# EAGLE board eaa651fdd346d6544176813de3c28a36 (EAGLE 7.1.0)
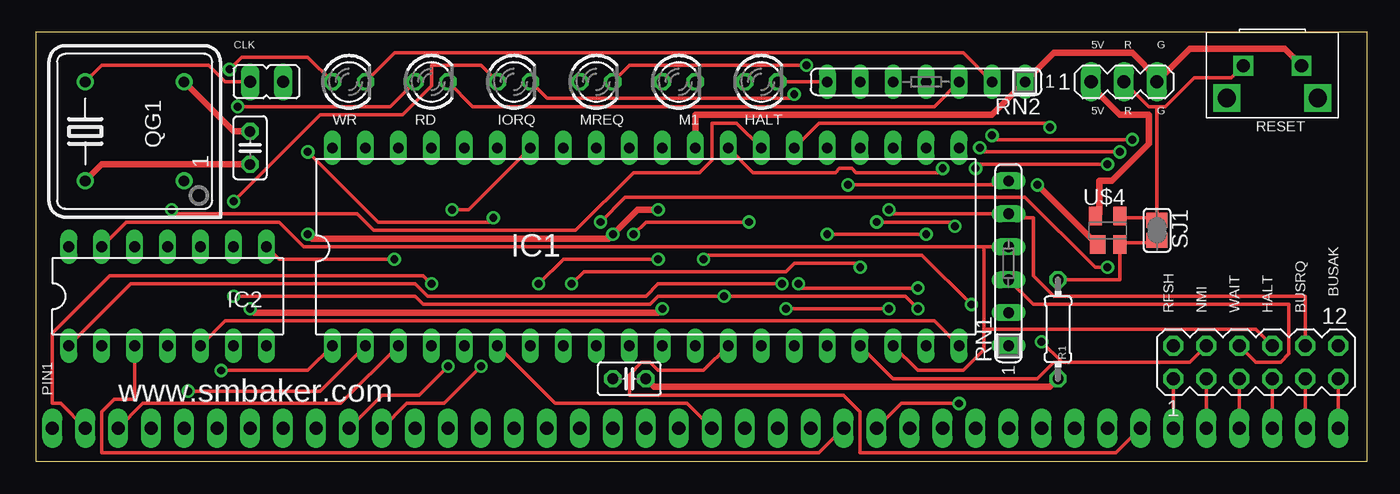
[diagram p0: board, top side]
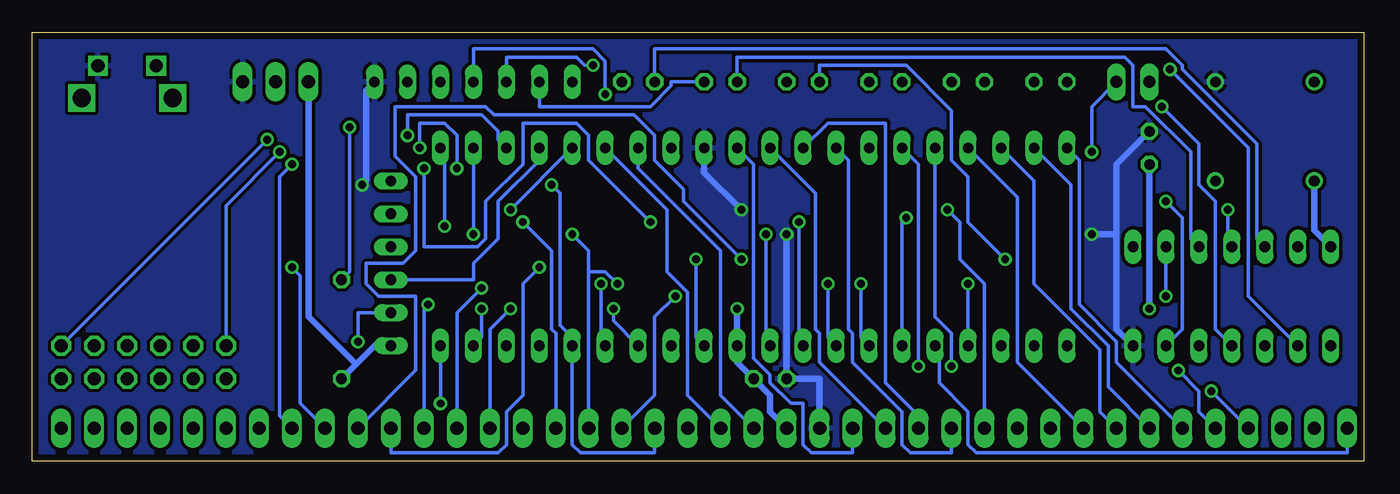
[diagram p1: board, bottom side, seen from below]

Size 102.54 x 33.01 mm. Coordinates in mm from the lower left corner, seen from the top.
Outline: 0,0 102.54,0 102.54,33.01 0,33.01 0,0
Copper layers (1*16): Top 0.035mm / dielectric 1.5mm / Bottom 0.035mm
Design rules "default *": minimum track width 10mil, minimum drill 24mil, track to track 10mil, track to pad 10mil, pad to pad 10mil, via to via 10mil, smd to smd 8mil, copper to edge 20mil, drill to drill 8mil, minimum pad ring 10mil, minimum via ring 8mil, stop-mask expansion 4mil, vias tented up to drill 25mil, thermal gap 10mil
Net classes: 1 PWR: width 0.508 mm

## Footprints (pad centres in the part's own frame; a part is rotated, then mirrored left to right if it is on the bottom)
C025-025X050 = drill 0.813 octagon: 1 -1.27,0; 2 1.27,0
DIL40 = drill 0.813 long: 1 -24.13,-7.62; 2 -21.59,-7.62; 3 -19.05,-7.62; 4 -16.51,-7.62; 5 -13.97,-7.62; 6 -11.43,-7.62; 7 -8.89,-7.62; 8 -6.35,-7.62; 9 -3.81,-7.62; 10 -1.27,-7.62; 11 1.27,-7.62; 12 3.81,-7.62; 13 6.35,-7.62; 14 8.89,-7.62; 15 11.43,-7.62; 16 13.97,-7.62; 17 16.51,-7.62; 18 19.05,-7.62; 19 21.59,-7.62; 20 24.13,-7.62; 21 24.13,7.62; 22 21.59,7.62; 23 19.05,7.62; 24 16.51,7.62; 25 13.97,7.62; 26 11.43,7.62; 27 8.89,7.62; 28 6.35,7.62; 29 3.81,7.62; 30 1.27,7.62; 31 -1.27,7.62; 32 -3.81,7.62; 33 -6.35,7.62; 34 -8.89,7.62; 35 -11.43,7.62; 36 -13.97,7.62; 37 -16.51,7.62; 38 -19.05,7.62; 39 -21.59,7.62; 40 -24.13,7.62
DIL14 = drill 0.813 long: 1 -7.62,-3.81; 2 -5.08,-3.81; 3 -2.54,-3.81; 4 0,-3.81; 5 2.54,-3.81; 6 5.08,-3.81; 7 7.62,-3.81; 8 7.62,3.81; 9 5.08,3.81; 10 2.54,3.81; 11 0,3.81; 12 -2.54,3.81; 13 -5.08,3.81; 14 -7.62,3.81
JP1 = drill 0.914 long: 1 0,-1.27; 2 0,1.27
LED3MM = drill 0.813 octagon: A -1.27,0; K 1.27,0
DIL08S = drill 0.813: 1 -3.81,-3.81; 4 3.81,-3.81; 5 3.81,3.81; 8 -3.81,3.81
0204/7 = drill 0.813 octagon: 1 -3.81,0; 2 3.81,0
SIL6 = drill 0.813 long: 1 -6.35,0; 2 -3.81,0; 3 -1.27,0; 4 1.27,0; 5 3.81,0; 6 6.35,0
SIL7 = drill 0.813 long: 1 -7.62,0; 2 -5.08,0; 3 -2.54,0; 4 0,0; 5 2.54,0; 6 5.08,0; 7 7.62,0
SJ = smd 1.168 x 1.6: 1 -0.762,0; 2 0.762,0
MA06-2 = drill 1.016 octagon: 1 -6.35,-1.27; 2 -6.35,1.27; 3 -3.81,-1.27; 4 -3.81,1.27; 5 -1.27,-1.27; 6 -1.27,1.27; 7 1.27,-1.27; 8 1.27,1.27; 9 3.81,-1.27; 10 3.81,1.27; 11 6.35,-1.27; 12 6.35,1.27
MA03-1 = drill 1.016 long: 1 -2.54,0; 2 0,0; 3 2.54,0
SIP40 = drill 1.016 long: 1 -48.26,0; 2 -45.72,0; 3 -43.18,0; 4 -40.64,0; 5 -38.1,0; 6 -35.56,0; 7 -33.02,0; 8 -30.48,0; 9 -27.94,0; 10 -25.4,0; 11 -22.86,0; 12 -20.32,0; 13 -17.78,0; 14 -15.24,0; 15 -12.7,0; 16 -10.16,0; 17 -7.62,0; 18 -5.08,0; 19 -2.54,0; 20 0,0; 21 2.54,0; 22 5.08,0; 23 7.62,0; 24 10.16,0; 25 12.7,0; 26 15.24,0; 27 17.78,0; 28 20.32,0; 29 22.86,0; 30 25.4,0; 31 27.94,0; 32 30.48,0; 33 33.02,0; 34 35.56,0; 35 38.1,0; 36 40.64,0; 37 43.18,0; 38 45.72,0; 39 48.26,0; 40 50.8,0
SOT143 = smd 1.2 x 1.44: 1 -0.75,-1.1 | smd 1 x 1.44: 2 0.95,-1.1; 3 0.95,1.1; 4 -0.95,1.1
BUTTON_RA = drill 1.397 square: NC1 -3.505,1.245; NC2 3.505,1.245 | drill 1.016 square: P$1 -2.248,-1.245; P$2 2.248,-1.245

## Placement (x,y rotation side)
C1  [C025-025X050]  45.72,6.35 180 top
C2  [C025-025X050]  16.51,24.13 90 top
IC1  [DIL40]  46.99,16.51 0 top
IC2  74HCT04N  [DIL14]  10.16,12.7 0 top
JP1  [JP1]  17.78,29.21 270 top
LED1  [LED3MM]  24.13,29.21 0 top
LED2  [LED3MM]  30.48,29.21 0 top
LED3  [LED3MM]  36.83,29.21 0 top
LED4  [LED3MM]  43.18,29.21 0 top
LED5  [LED3MM]  49.53,29.21 0 top
LED6  [LED3MM]  55.88,29.21 0 top
QG1  [DIL08S]  7.62,25.4 90 top
R1  2.2K  [0204/7]  78.74,10.16 90 top
RN1  10K  [SIL6]  74.93,15.24 90 top
RN2  [SIL7]  68.58,29.21 180 top
SJ1  [SJ]  86.36,17.78 270 top
SV1  [MA06-2]  93.98,7.62 0 top
SV2  [MA03-1]  83.82,29.21 0 top
U$1  RC2014  [SIP40]  49.53,2.54 0 top
U$4  MAX811  [SOT143]  82.55,17.78 0 top
U$5  BUTTON_RA  [BUTTON_RA]  95.25,29.21 180 top

## Library data of the parts
C1 C2 R1 = resistor
IC1 = zilog
IC2 = 74xx-eu
JP1 SJ1 = jumper
LED1-LED6 = led
QG1 = crystal; OC_FARNELL: unknown; OC_NEWARK: unknown
RN1 RN2 = resistor-sil; OC_FARNELL: unknown; OC_NEWARK: unknown
SV1 SV2 = con-lstb; OC_FARNELL: unknown; OC_NEWARK: unknown
U$1 U$4 U$5 = scott

## Nets
+5V [PWR]: C1.1 C2.1 IC1.11 IC2.14 QG1.8 R1.1 RN1.1 SV2.1 U$1.18 U$4.4
A0: IC1.30 U$1.16
A1: IC1.31 U$1.15
A2: IC1.32 U$1.14
A3: IC1.33 U$1.13
A4: IC1.34 U$1.12
A5: IC1.35 U$1.11
A6: IC1.36 U$1.10
A7: IC1.37 U$1.9
A8: IC1.38 U$1.8
A9: IC1.39 U$1.7
A10: IC1.40 U$1.6
A11: IC1.1 U$1.5
A12: IC1.2 U$1.4
A13: IC1.3 U$1.3
A14: IC1.4 U$1.2
A15: IC1.5 U$1.1
BUSAK: IC1.23 SV1.12
BUSRQ: IC1.25 RN1.5 SV1.10
CLK: IC1.6 JP1.2 U$1.21
D0: IC1.14 U$1.27
D1: IC1.15 U$1.28
D2: IC1.12 U$1.29
D3: IC1.8 U$1.30
D4: IC1.7 U$1.31
D5: IC1.9 U$1.32
D6: IC1.10 U$1.33
D7: IC1.13 U$1.34
E0: SV1.5 U$1.37
E1: SV1.7 U$1.38
E2: SV1.9 U$1.39
E3: SV1.11 U$1.40
GND [PWR]: C1.2 C2.2 IC1.29 IC2.7 QG1.4 RN2.1 SV2.3 U$1.17 U$4.1 U$5.P$1
HALT: IC1.18 IC2.13 RN1.4 SV1.8
INT: IC1.16 RN1.6 U$1.22
IORQ: IC1.20 IC2.5 U$1.26
M1: IC1.27 IC2.11 U$1.19
MREQ: IC1.19 IC2.9 U$1.23
N$1: SJ1.1 SV2.2 U$4.3 U$5.P$2
N$2: JP1.1 QG1.5
N$3: IC2.2 LED1.A
N$4: IC2.4 LED2.A
N$5: IC2.6 LED3.A
N$6: IC2.8 LED4.A
N$7: IC2.10 LED5.A
N$8: IC2.12 LED6.A
N$9: LED1.K RN2.2
N$10: LED2.K RN2.3
N$11: LED3.K RN2.4
N$12: LED4.K RN2.5
N$13: LED5.K RN2.6
N$14: LED6.K RN2.7
NMI: IC1.17 RN1.2 SV1.4
RD: IC1.21 IC2.3 U$1.25
RESET: IC1.26 R1.2 SJ1.2 U$1.20 U$4.2
RFSH: IC1.28 SV1.2
RX: SV1.3 U$1.36
TX: SV1.1 U$1.35
WAIT: IC1.24 RN1.3 SV1.6
WR: IC1.22 IC2.1 U$1.24

## Tracks (layer width: path | path; a pad name or v marks a point on that pad's centre or on a via)
+5V  (via drill 0.61)
  Top 0.508: C2.1 5.08,22.86 QG1.8 | SV2.1 81.28,28.89 83.5,26.67 85.72,26.67 85.72,24.45 82.87,21.59 81.92,21.59 81.92,19.05 U$4.4 | C1.1 47.62,5.71 78.11,5.71 R1.1 | v16.51,11.75 16.83,11.43 47.94,11.43 v48.26,11.75
  Bottom 0.508: IC2.14 3.81,17.78 QG1.8 | U$1.18 45.72,3.81 45.72,5.08 C1.1 48.26,7.62 IC1.11 v48.26,11.75 | RN1.1 76.2,8.89 77.63,7.46 | R1.1 77.63,7.46 | 77.63,7.46 81.28,11.11 SV2.1 | v16.51,11.75 C2.1
A0
  Bottom 0.254: IC1.30 46.99,22.86 46.99,7.94 45.72,6.67 45.72,6.03 44.13,4.45 43.18,4.45 43.18,1.27 42.55,0.64 39.37,0.64 U$1.16
A1
  Bottom 0.254: IC1.31 42.23,20.64 42.23,10.16 41.91,9.84 41.91,7.62 U$1.15
A2
  Bottom 0.254: IC1.32 41.27,26.04 36.83,26.04 36.83,6.03 34.29,3.49 U$1.14
A3
  Bottom 0.254: IC1.33 39.69,23.18 39.69,10.16 39.37,9.84 39.37,7.62 35.56,3.81 35.56,1.27 34.92,0.64 31.75,0.64 U$1.13
A4  (via drill 0.61)
  Top 0.254: IC1.34 33.34,19.37 v32.07,19.37
  Bottom 0.254: v32.07,19.37 31.11,18.41 31.11,15.56 29.21,13.65 U$1.12
A5  (via drill 0.61)
  Top 0.254: v34.29,7.3 31.43,4.45 28.57,4.45 U$1.11
  Bottom 0.254: IC1.35 34.29,22.86 v34.29,7.3
A6  (via drill 0.61)
  Top 0.254: v31.75,7.3 29.53,5.08 26.67,5.08 U$1.10
  Bottom 0.254: IC1.36 33.02,11.11 31.75,9.84 v31.75,7.3
A7
  Bottom 0.254: IC1.37 26.67,20.32 26.67,7.62 U$1.9
A8
  Bottom 0.254: IC1.38 25.4,21.59 25.4,13.65 20.32,8.57 20.32,3.81 U$1.8
A9
  Bottom 0.254: IC1.39 22.54,21.27 22.54,11.75 19.68,8.89 19.68,5.71 U$1.7
A10
  Bottom 0.254: IC1.40 21.91,23.18 21.91,12.06 19.05,9.21 19.05,7.62 U$1.6
A11  (via drill 0.61)
  Top 0.254: IC1.1 20.95,6.99 v14.29,6.99
  Bottom 0.254: v14.29,6.99 12.7,5.4 12.7,3.81 U$1.5
A12  (via drill 0.61)
  Top 0.254: IC1.2 21.91,5.4 v11.75,5.4
  Bottom 0.254: U$1.4 v11.75,5.4
A13
  Top 0.254: IC1.3 23.5,4.45 8.26,4.45 U$1.3
A14  (via drill 0.61)
  Top 0.254: v30.48,13.65 29.84,14.29 5.71,14.29 1.27,9.84 1.27,4.45 1.91,4.45 U$1.2
  Bottom 0.254: v30.48,13.65 IC1.4
A15
  Bottom 0.254: IC1.5 32.7,8.57 32.7,6.03 30.48,3.81 30.48,1.27 29.84,0.64 1.27,0.64 U$1.1
BUSAK  (via drill 0.61)
  Top 0.254: v73.66,25.08 73.98,24.77 v84.45,24.77
  Bottom 0.254: IC1.23 66.67,24.77 66.67,25.4 67.94,26.67 73.66,26.67 v73.66,25.08 | SV1.12 v84.45,24.77
BUSRQ  (via drill 0.61)
  Top 0.254: v65.72,19.37 66.04,19.05 RN1.5 75.25,18.73 76.83,18.73 76.83,14.29 78.42,12.7 97.79,12.7 SV1.10
  Bottom 0.254: v65.72,19.37 IC1.25
CLK  (via drill 0.61)
  Top 0.254: IC1.6 40.01,4.45 50.16,4.45 U$1.21 | v20.95,23.81 26.35,18.41 34.92,18.41 v35.24,18.73
  Bottom 0.254: JP1.2 20.95,27.3 v20.95,23.81 | v35.24,18.73 35.56,18.41 IC1.6
D0  (via drill 0.61)
  Top 0.254: v65.72,11.75 v57.78,11.75
  Bottom 0.254: IC1.14 57.78,10.79 v57.78,11.75 | v65.72,11.75 67.31,10.16 U$1.27
D1  (via drill 0.61)
  Top 0.254: v58.74,13.65 59.05,13.34 v67.94,13.34
  Bottom 0.254: IC1.15 58.74,9.21 v58.74,13.65 | v67.94,13.34 69.85,11.43 U$1.28
D2  (via drill 0.61)
  Top 0.254: v51.44,15.56 51.75,15.88 68.26,15.88 v72.07,12.06
  Bottom 0.254: IC1.12 51.44,9.53 v51.44,15.56 | v72.07,12.06 72.39,11.75 U$1.29
D3  (via drill 0.61)
  Top 0.254: v41.27,13.65 42.23,14.61 57.78,14.61 58.42,15.24 63.18,15.24 v63.5,14.92
  Bottom 0.254: IC1.8 41.27,9.53 v41.27,13.65 | v63.5,14.92 64.77,13.65 64.77,5.08 66.04,3.81 66.04,1.27 66.67,0.64 74.93,0.64 U$1.30
D4  (via drill 0.61)
  Top 0.254: v38.73,13.65 40.64,15.56 v47.94,15.56
  Bottom 0.254: IC1.7 38.73,9.53 v38.73,13.65 | v47.94,15.56 52.39,20 52.39,20.95 54.61,23.18 54.61,25.08 56.2,26.67 66.99,26.67 67.63,27.3 74.61,27.3 74.61,23.5 73.03,21.91 73.03,16.19 73.98,15.24 76.83,15.24 76.83,13.65 75.88,12.7 73.03,12.7 73.03,6.99 U$1.31
D5  (via drill 0.61)
  Top 0.254: v43.5,18.41 45.4,20.32 76.2,20.32 81.6,14.92 v82.55,14.92
  Bottom 0.254: IC1.9 43.5,9.21 v43.5,18.41 | v82.55,14.92 81.92,14.29 81.92,4.45 U$1.32
D6  (via drill 0.61)
  Top 0.254: v46.04,17.46 46.99,18.41 v54.93,18.41 | v72.39,22.54 72.71,22.86 v82.55,22.86
  Bottom 0.254: IC1.10 46.04,9.21 v46.04,17.46 | v54.93,18.41 59.69,23.18 59.69,25.08 60.64,26.04 64.77,26.04 64.77,22.86 67.63,20 67.63,17.14 68.26,16.51 72.39,16.51 v72.39,22.54 | v82.55,22.86 83.5,21.91 83.5,3.49 U$1.33
D7
  Top 0.254: IC1.13 51.44,6.99 47.94,6.99 47.31,7.62 46.67,7.62 45.72,6.67 45.72,5.08 62.23,5.08 63.5,3.81 63.5,0.64 83.19,0.64 U$1.34
E0
  Top 0.254: SV1.5 U$1.37
E1
  Top 0.254: SV1.7 U$1.38
E2
  Top 0.254: SV1.9 U$1.39
E3
  Top 0.254: SV1.11 U$1.40
GND  (via drill 0.61)
  Top 0.508: QG1.4 15.24,25.4 C2.2 | U$5.P$1 96.2,31.75 88.9,31.75 SV2.3 86.36,29.53 84.45,31.43 78.42,31.43 RN2.1 73.66,26.67 50.8,26.67 IC1.29 | v77.15,21.27 81.6,16.83 U$4.1 | v47.94,19.37 46.35,19.37 v44.45,17.46 44.13,17.14 21.27,17.14 v20.95,17.46
  Bottom 0.508: IC2.7 19.05,10.16 19.05,17.46 | 19.05,17.46 19.05,22.86 C2.2 | U$1.17 41.91,6.35 C1.2 v44.45,17.46 | v77.15,21.27 76.83,21.59 76.83,28.57 RN2.1 | v47.94,19.37 50.8,22.23 IC1.29 | v20.95,17.46 19.05,17.46
  pour Bottom: 0,0 102.87,0 102.87,33.02 0,33.02
HALT
  Top 0.254: IC1.18 67.94,6.99 71.44,6.99 73.03,8.57 73.03,10.16 | 73.03,16.51 73.03,10.16 | RN1.4 73.03,16.51 | IC2.13 6.99,18.41 18.73,18.41 20.64,16.51 73.03,16.51 | SV1.8 93.98,10.16 73.03,10.16
INT  (via drill 0.61)
  Top 0.254: RN1.6 74.61,21.27 v62.55,21.27
  Bottom 0.254: U$1.22 54.61,0.64 60.33,0.64 60.96,1.27 IC1.16 60.96,9.53 61.91,10.48 61.91,20.64 v62.55,21.27
IORQ  (via drill 0.61)
  Top 0.254: IC2.5 14.61,10.79 69.22,10.79 IC1.20 | U$1.26 66.67,4.45 v71.12,4.45
  Bottom 0.254: IC1.20 v71.12,4.45
M1  (via drill 0.61)
  Top 0.254: v10.48,19.37 10.79,19.05 24.77,19.05 26.04,17.78 41.59,17.78 46.04,22.23 51.12,22.23 52.07,23.18 52.07,26.04 53.98,26.04 IC1.27
  Bottom 0.254: IC2.11 10.48,16.83 v10.48,19.37 | U$1.19 49.53,5.08 49.53,16.19 55.88,22.54 IC1.27
MREQ  (via drill 0.61)
  Top 0.254: v15.24,12.7 29.21,12.7 29.84,12.06 47.31,12.06 47.94,12.7 v53.02,12.7 66.99,12.7 v67.94,11.75
  Bottom 0.254: v15.24,12.7 IC2.9 | v53.02,12.7 54.61,11.11 54.61,5.08 U$1.23 | IC1.19 67.94,9.53 v67.94,11.75
N$1
  Top 0.254: 86.36,18.73 83.5,18.73 U$4.3 | 86.36,27.3 86.36,18.73 | 86.36,27.3 85.72,27.3 SV2.2 | 86.36,18.73 SJ1.1 | U$5.P$2 92.08,29.53 89.22,29.53 87,27.3 86.36,27.3
N$2
  Top 0.254: QG1.5 5.08,30.48 13.34,30.48 14.61,29.21 JP1.1
N$3  (via drill 0.61)
  Top 0.254: v14.92,30.16 15.88,31.11 20.95,31.11 LED1.A
  Bottom 0.254: IC2.2 8.89,12.7 8.89,24.13 v14.92,30.16
N$4  (via drill 0.61)
  Top 0.254: v15.56,27.3 27.3,27.3 LED2.A
  Bottom 0.254: IC2.4 11.43,10.16 11.43,20 12.7,21.27 12.7,24.45 v15.56,27.3
N$5  (via drill 0.61)
  Top 0.254: v15.24,20 21.91,26.67 28.26,26.67 30.48,28.89 30.48,30.48 34.29,30.48 LED3.A
  Bottom 0.254: IC2.6 13.97,10.16 13.97,18.73 v15.24,20
N$6  (via drill 0.61)
  Top 0.254: IC2.8 18.73,15.56 v27.62,15.56
  Bottom 0.254: v27.62,15.56 30.48,18.41 30.48,21.91 31.75,23.18 31.75,26.99 35.24,30.48 41.91,30.48 LED4.A
N$7
  Bottom 0.254: IC2.10 13.34,17.14 13.34,23.81 16.83,27.3 17.78,27.3 17.78,30.48 18.41,31.11 48.26,31.11 LED5.A
N$8
  Bottom 0.254: IC2.12 8.26,17.14 8.26,24.45 13.97,30.16 13.97,30.48 15.24,31.75 54.61,31.75 LED6.A
N$9
  Top 0.254: LED1.K 27.62,31.43 71.44,31.43 RN2.2
N$10
  Top 0.254: LED2.K 33.66,27.3 69.22,27.3 RN2.3
N$11  (via drill 0.61)
  Top 0.254: LED3.K 39.37,27.94 58.1,27.94 v58.42,28.26
  Bottom 0.254: v58.42,28.26 58.42,30.8 59.37,31.75 68.58,31.75 RN2.4
N$12  (via drill 0.61)
  Top 0.254: LED4.K 45.72,30.48 v59.37,30.48
  Bottom 0.254: v59.37,30.48 60.01,30.48 60.64,31.11 66.04,31.11 RN2.5
N$13
  Bottom 0.254: LED5.K 53.34,29.21 53.34,28.89 54.93,27.3 63.5,27.3 RN2.6
N$14
  Top 0.254: RN2.7 LED6.K
NMI  (via drill 0.61)
  Top 0.254: IC1.17 66.04,6.35 77.15,6.35 78.42,7.62 79.06,7.62 | 79.06,7.62 88.9,7.62 SV1.4 | 79.06,7.62 v77.47,9.21
  Bottom 0.254: RN1.2 77.47,11.43 v77.47,9.21
RD  (via drill 0.61)
  Top 0.254: IC2.3 7.62,4.76 6.03,4.76 5.08,3.81 5.08,0.64 60.33,0.64 U$1.25 | v70.8,18.1 70.48,18.41 v64.77,18.41
  Bottom 0.254: IC1.21 70.8,23.81 v70.8,18.1 | v64.77,18.41 62.55,16.19 62.55,10.16 62.23,9.84 U$1.25
RESET  (via drill 0.61)
  Top 0.254: SJ1.2 86.36,16.83 83.5,16.83 U$4.2 83.5,16.51 83.5,13.97 R1.2 | v78.11,25.72 77.79,26.04 60.33,26.04 IC1.26
  Bottom 0.254: IC1.26 53.66,19.37 53.66,14.61 52.07,13.02 52.07,5.08 U$1.20 | R1.2 78.11,14.61 v78.11,25.72
RFSH  (via drill 0.61)
  Top 0.254: IC1.28 55.24,22.23 61.59,22.23 61.91,22.54 62.87,22.54 63.18,22.23 69.53,22.23 v69.85,22.54 | v72.71,24.13 73.03,23.81 v83.5,23.81
  Bottom 0.254: v69.85,22.54 69.85,25.08 70.8,26.04 72.71,26.04 v72.71,24.13 | v83.5,23.81 87.63,19.68 SV1.2
RX
  Top 0.254: SV1.3 U$1.36
TX
  Top 0.254: SV1.1 U$1.35
WAIT
  Top 0.254: SV1.6 93.98,7.62 95.89,7.62 96.52,8.26 96.52,12.06 76.83,12.06 RN1.3
  Bottom 0.254: RN1.3 68.58,13.97 68.58,15.24 66.67,17.14 66.67,20 63.5,23.18 IC1.24
WR  (via drill 0.61)
  Top 0.254: IC2.1 7.3,13.65 29.21,13.65 30.16,12.7 46.99,12.7 47.94,13.65 v57.47,13.65 | v60.96,17.46 v68.58,17.46
  Bottom 0.254: v57.47,13.65 58.42,14.61 59.69,14.61 | U$1.24 59.69,14.61 | v68.58,17.46 IC1.22 | v60.96,17.46 59.69,16.19 59.69,14.61

## Text on the board
tPlace: CLK | 5V | R | G | 5V | R | G | WR | RD | IORQ | MREQ | M1 | HALT | RESET | BUSAK | RFSH | NMI | WAIT | HALT | BUSRQ | PIN1 | www.smbaker.com